# EAGLE board Pi3_Analog_hat (EAGLE 7.6.0)
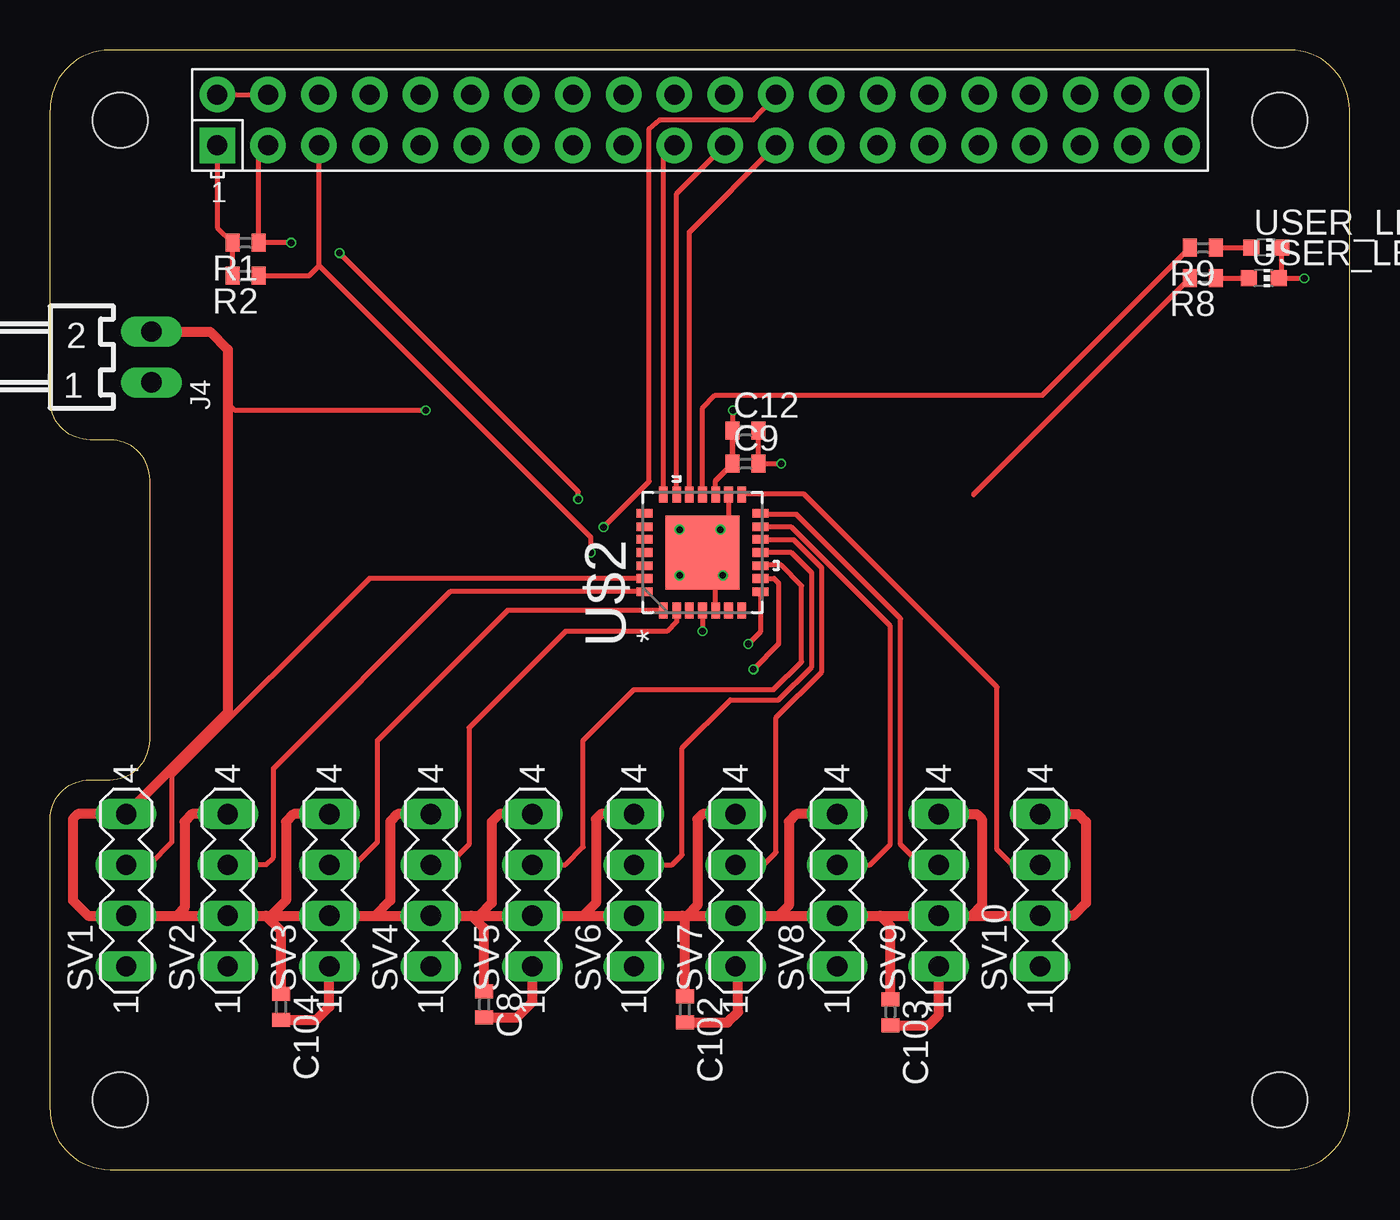
[diagram p0: board, top side]
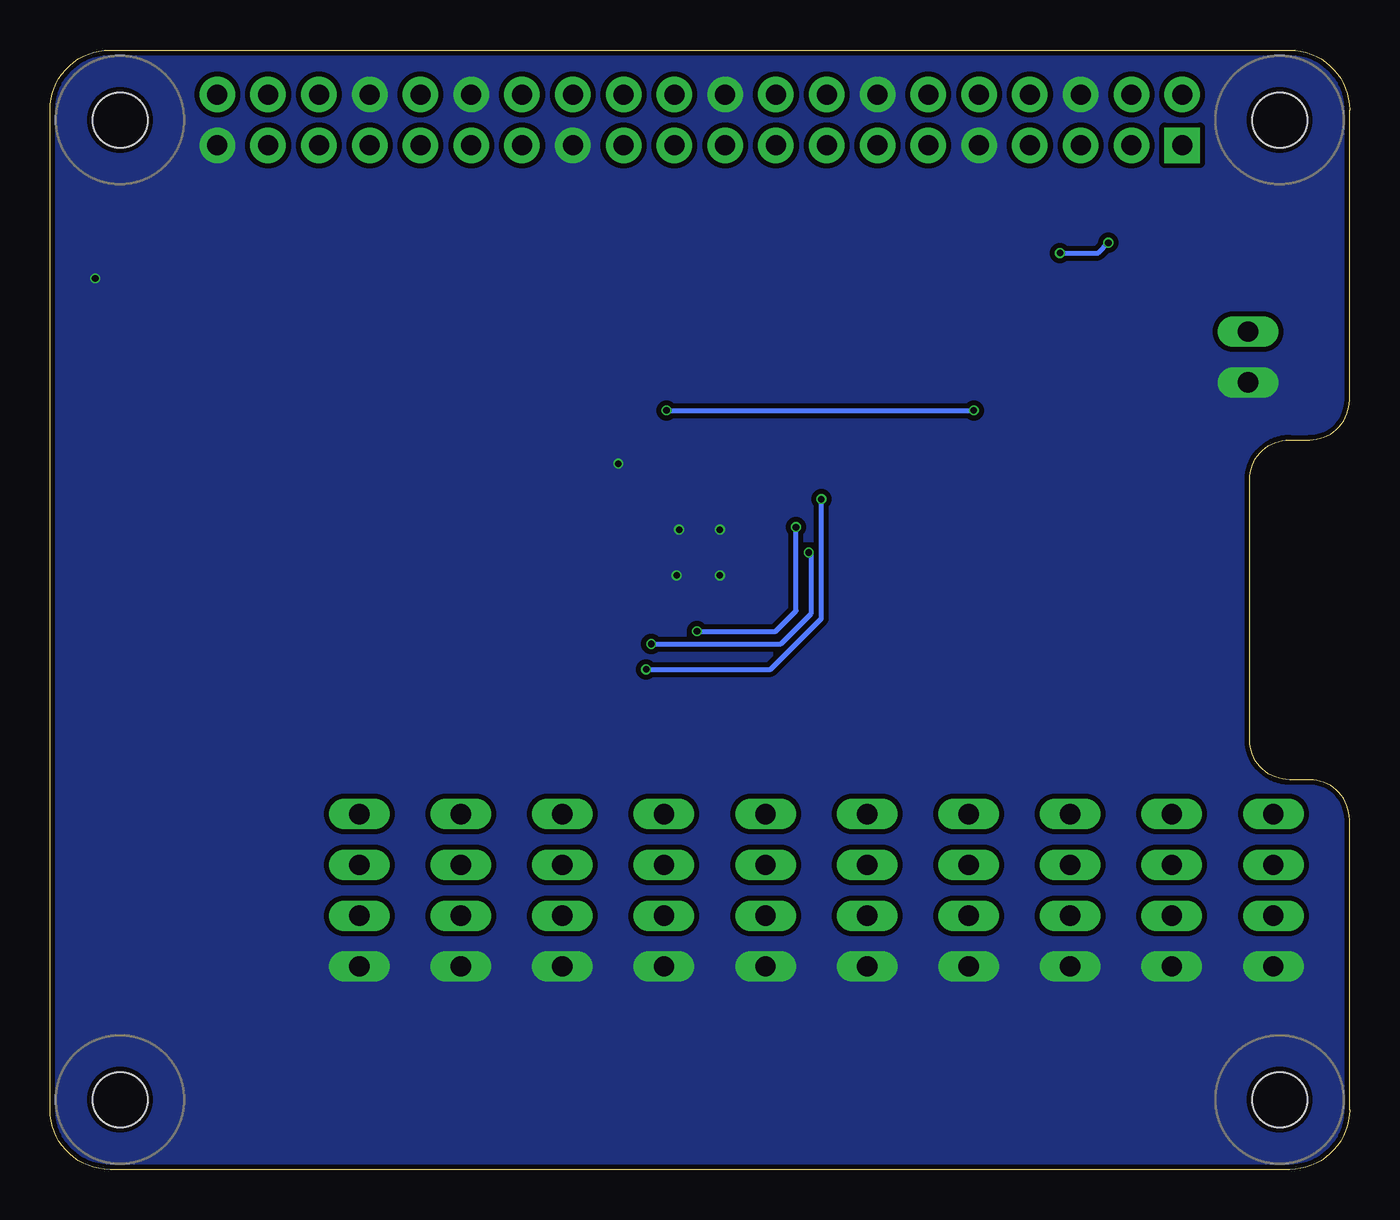
[diagram p1: board, bottom side, seen from below]

Size 65 x 56 mm. Coordinates in mm from the lower left corner, seen from the top.
Copper layers (1*16): Top 0.035mm / dielectric 1.5mm / Bottom 0.035mm
Design rules "EagleRules-2-Layer-Shep": minimum track width 6mil, minimum drill 12mil, track to track 6mil, track to pad 6mil, pad to pad 6mil, via to via 6mil, smd to smd 0mil, copper to edge 10mil, drill to drill 10mil, minimum pad ring 2mil, minimum via ring 2mil, stop-mask expansion 2mil, vias tented up to drill 100mil, thermal gap 10mil

## Footprints (pad centres in the part's own frame; a part is rotated, then mirrored left to right if it is on the bottom)
C0402 = smd 0.7 x 0.9: 1 -0.65,0; 2 0.65,0
7395-02 = drill 1.016 long: 1 1.27,0; 2 -1.27,0
R0402 = smd 0.7 x 0.9: 1 -0.65,0; 2 0.65,0
MA04-1 = drill 1.016 long: 1 -3.81,0; 2 -1.27,0; 3 1.27,0; 4 3.81,0
QFN65P600X600X100-28N = smd 0.813 x 0.432: 1 -2.896,1.956; 2 -2.896,1.295; 3 -2.896,0.66; 4 -2.896,0; 5 -2.896,-0.66; 6 -2.896,-1.295; 7 -2.896,-1.956; 15 2.896,-1.956; 16 2.896,-1.295; 17 2.896,-0.66; 18 2.896,0; 19 2.896,0.66; 20 2.896,1.295; 21 2.896,1.956 | smd 0.432 x 0.813: 8 -1.956,-2.896; 9 -1.295,-2.896; 10 -0.66,-2.896; 11 0,-2.896; 12 0.66,-2.896; 13 1.295,-2.896; 14 1.956,-2.896; 22 1.956,2.896; 23 1.295,2.896; 24 0.66,2.896; 25 0,2.896; 26 -0.66,2.896; 27 -1.295,2.896; 28 -1.956,2.896 | smd 3.708 x 3.708: 29 0,0
CHIP-LED0603 = smd 0.8 x 0.8: A 0,-0.75; C 0,0.75
RASPI_BOARD_B+HAT_DF = drill 1 pad 1.778 square: 1 8.37,51.23 | drill 1 pad 1.778: 2 8.37,53.77; 3 10.91,51.23; 4 10.91,53.77; 5 13.45,51.23; 6 13.45,53.77; 7 15.99,51.23; 8 15.99,53.77; 9 18.53,51.23; 10 18.53,53.77; 11 21.07,51.23; 12 21.07,53.77; 13 23.61,51.23; 14 23.61,53.77; 15 26.15,51.23; 16 26.15,53.77; 17 28.69,51.23; 18 28.69,53.77; 19 31.23,51.23; 20 31.23,53.77; 21 33.77,51.23; 22 33.77,53.77; 23 36.31,51.23; 24 36.31,53.77; 25 38.85,51.23; 26 38.85,53.77; 27 41.39,51.23; 28 41.39,53.77; 29 43.93,51.23; 30 43.93,53.77; 31 46.47,51.23; 32 46.47,53.77; 33 49.01,51.23; 34 49.01,53.77; 35 51.55,51.23; 36 51.55,53.77; 37 54.09,51.23; 38 54.09,53.77; 39 56.63,51.23; 40 56.63,53.77 | hole 2.75: 3.5,3.5; 3.5,52.5; 61.5,3.5; 61.5,52.5

## Placement (x,y rotation side)
C8  1uF  [C0402]  21.72,8.26 270 top
C9  0.1uF  [C0402]  34.8,35.31 0 top
C12  5uF  [C0402]  34.8,36.96 0 top
C102  5uF  [C0402]  31.75,8 270 top
C103  5uF  [C0402]  42.04,7.87 270 top
C104  5uF  [C0402]  11.56,8.13 270 top
J4  22-05-7028-02  [7395-02]  5.08,40.64 270 top
R1  4.7k  [R0402]  9.78,46.35 180 top
R2  4.7k  [R0402]  9.78,44.7 180 top
R8  500  [R0402]  57.66,44.58 180 top
R9  500  [R0402]  57.66,46.1 180 top
SV1  [MA04-1]  3.81,13.97 90 top
SV2  [MA04-1]  8.89,13.97 90 top
SV3  [MA04-1]  13.97,13.97 90 top
SV4  [MA04-1]  19.05,13.97 90 top
SV5  [MA04-1]  24.13,13.97 90 top
SV6  [MA04-1]  29.21,13.97 90 top
SV7  [MA04-1]  34.29,13.97 90 top
SV8  [MA04-1]  39.37,13.97 90 top
SV9  [MA04-1]  44.45,13.97 90 top
SV10  [MA04-1]  49.53,13.97 90 top
U$2  PIC16F73-I/ML  [QFN65P600X600X100-28N]  32.64,30.86 90 top
USER_LED3  [CHIP-LED0603]  60.71,44.58 270 top
USER_LED4  [CHIP-LED0603]  60.83,46.1 270 top
X1  RASPI_BOARD_B+#_HD  [RASPI_BOARD_B+HAT_DF]  0,0 0 top

## Library data of the parts
C8 C9 C12 C102-C104 = rcl
J4 = con-molex; OC_FARNELL: 9731601; OC_NEWARK: unknown
R1 R2 R8 R9 = resistor
SV1-SV10 = con-lstb; OC_FARNELL: unknown; OC_NEWARK: unknown
U$2 = Microchip_By_element14_Batch_1; DESCRIPTION: 8-bit CMOS FLASH Microcontrollers; MPN: PIC16F73-I/ML; OC_FARNELL: 1084327; OC_NEWARK: 97K7368; PACKAGE: QFN-28; SUPPLIER: Microchip
USER_LED3 USER_LED4 = led
X1 = Pi3_Power_hat_Rev1

## Nets
3V3B: X1.17
5V: C8.1 C9.1 C12.1 C102.1 C103.1 C104.1 J4.2 SV1.2 SV1.4 SV2.2 SV2.4 SV3.2 SV3.4 SV4.2 SV4.4 SV5.2 SV5.4 SV6.2 SV6.4 SV7.2 SV7.4 SV8.2 SV8.4 SV9.2 SV9.4 SV10.2 SV10.4 U$2.17
+3V3: R1.2 R2.2 X1.1
CH1: SV10.3 U$2.15
CH2: SV9.3 U$2.14
CH3: SV8.3 U$2.13
CH4: SV7.3 U$2.12
CH5: SV6.3 U$2.11
CH6: SV5.3 U$2.10
CH7: SV4.3 U$2.2
CH8: SV3.3 U$2.1
CH9: SV2.3 U$2.28
CH10: SV1.3 U$2.27
GND: C8.2 C9.2 C12.2 C102.2 C103.2 C104.2 J4.1 SV1.1 SV2.1 SV3.1 SV4.1 SV5.1 SV6.1 SV7.1 SV8.1 SV9.1 SV10.1 U$2.5 U$2.16 U$2.29 USER_LED3.C USER_LED4.C X1.6 X1.9 X1.14 X1.20 X1.25 X1.30 X1.34 X1.39
ICSPCLK: U$2.24
ICSPDAT: U$2.25
MCLR/VPP_A: U$2.26
N$1: X1.2 X1.4
N$2: U$2.3
N$3: U$2.22
N$4: U$2.23
N$9: R8.1 USER_LED3.A
N$10: R9.1 USER_LED4.A
SCL: R2.1 U$2.8 X1.5
SDA: R1.1 U$2.9 X1.3
SPI_CE: U$2.4 X1.24
SPI_MISO: U$2.20 X1.21
SPI_MOSI: U$2.21 X1.19
SPI_SCLK: U$2.19 X1.23
USER5: R8.2
USER6: R9.2 U$2.18

## Tracks (layer width: path | path; a pad name or v marks a point on that pad's centre or on a via)
5V  (via drill 0.33)
  Top 0.254: C12.1 C9.1 33.3,34.46 U$2.17 33.3,34.44 34.16,35.31 v34.16,37.97 | v18.8,37.97 9.27,37.97 8.89,38.35
  Top 0.508: 6.35,12.7 SV1.2 1.91,12.7 1.14,13.46 1.14,17.53 1.4,17.78 SV1.4 8.89,22.86 8.89,38.35 8.89,41.02 8,41.91 J4.2 | 6.35,12.7 SV2.2 10.79,12.7 | 10.79,12.7 11.05,12.7 | 11.05,12.7 SV3.2 16.26,12.7 | 16.26,12.7 SV4.2 21.08,12.7 | 21.08,12.7 21.46,12.7 | 21.46,12.7 SV5.2 26.67,12.7 | 26.67,12.7 SV6.2 31.62,12.7 | 31.62,12.7 31.88,12.7 | 31.88,12.7 SV7.2 36.45,12.7 | 36.45,12.7 SV8.2 41.53,12.7 | 41.53,12.7 SV9.2 46.1,12.7 | 46.1,12.7 SV10.2 51.18,12.7 51.82,13.34 51.82,17.4 51.44,17.78 SV10.4 | SV2.4 7.11,17.78 6.73,17.4 6.73,13.08 6.35,12.7 | SV3.4 12.19,17.78 11.81,17.4 11.81,13.46 11.05,12.7 | SV4.4 17.4,17.78 17.02,17.4 17.02,13.46 16.26,12.7 | SV5.4 22.48,17.78 22.1,17.4 22.1,13.34 21.46,12.7 | SV6.4 27.56,17.78 27.3,17.53 27.3,13.34 26.67,12.7 | SV7.4 32.64,17.78 32.38,17.53 32.38,13.21 31.88,12.7 | SV8.4 37.34,17.78 36.96,17.4 36.96,13.21 36.45,12.7 | SV9.4 46.35,17.78 46.61,17.53 46.61,13.21 46.1,12.7 | C104.1 11.56,11.94 10.79,12.7 | C8.1 21.72,12.06 21.08,12.7 | C102.1 31.75,12.57 31.62,12.7 | C103.1 42.04,12.19 41.53,12.7
  Bottom 0.254: v34.16,37.97 v18.8,37.97
+3V3
  Top 0.254: X1.1 8.37,47.11 R1.2 R2.2
CH1
  Top 0.254: SV10.3 48.13,15.24 47.37,16 47.37,24.13 37.72,33.78 34.62,33.78 U$2.15
CH2
  Top 0.254: SV9.3 43.56,15.24 42.55,16.26 42.55,27.56 37.34,32.77 35.59,32.77 U$2.14
CH3
  Top 0.254: SV8.3 41.02,15.24 42.04,16.26 42.04,27.18 37.08,32.13 35.56,32.13 U$2.13
CH4
  Top 0.254: SV7.3 35.69,15.24 36.32,15.88 36.32,22.61 38.61,24.89 38.61,30.1 37.21,31.5 35.56,31.5 U$2.12
CH5
  Top 0.254: SV6.3 31.11,15.24 31.62,15.75 31.62,21.08 34.04,23.5 36.45,23.5 38.1,25.15 38.1,29.84 37.08,30.86 U$2.11
CH6
  Top 0.254: SV5.3 25.78,15.24 26.67,16.13 26.67,21.46 29.21,24 36.2,24 37.59,25.4 37.59,29.21 36.58,30.23 35.56,30.23 U$2.10
CH7
  Top 0.254: U$2.2 31.34,27.41 30.86,26.92 25.78,26.92 20.95,22.1 20.95,16.26 19.94,15.24 SV4.3
CH8
  Top 0.254: U$2.1 22.89,27.96 16.38,21.46 16.38,16.38 15.24,15.24 SV3.3
CH9
  Top 0.254: U$2.28 20.02,28.91 11.18,20.07 11.18,15.62 10.79,15.24 SV2.3
CH10
  Top 0.254: U$2.27 15.98,29.57 6.1,19.68 6.1,16.38 4.95,15.24 SV1.3
GND  (via drill 0.33)
  Top 0.254: U$2.16 33.93,32.41 v33.53,32 | U$2.5 33.3,29.36 v33.66,29.72 | v62.74,44.58 USER_LED3.C 61.58,44.7 USER_LED4.C | C12.2 C9.2 v36.58,35.31
  Top 0.508: U$2.29 32.64,31.11 v33.53,32 | C8.2 23.35,7.61 24.13,8.38 SV5.1 | C102.2 33.89,7.35 34.42,7.87 34.42,10.03 SV7.1 | C103.2 43.93,7.22 44.45,7.75 SV9.1 | C104.2 13.32,7.48 13.97,8.13 SV3.1
  other vias: 31.5,29.72 31.5,32
  pour Bottom (isolate 0.254, no thermals): 0.13,-0.13 66.93,-0.13 66.93,56.64 0.13,56.64
N$1
  Top 0.254: X1.2 X1.4
N$9
  Top 0.254: R8.1 USER_LED3.A
N$10
  Top 0.254: R9.1 USER_LED4.A
SCL  (via drill 0.33)
  Top 0.254: R2.1 12.95,44.7 13.46,45.21 | 13.46,45.21 13.46,51.22 X1.5 | U$2.8 35.53,26.9 v34.92,26.29 | v27.05,30.86 27.05,31.62 13.46,45.21
  Bottom 0.254: v34.92,26.29 28.45,26.29 26.92,27.81 26.92,30.73 v27.05,30.86
SDA  (via drill 0.33)
  Top 0.254: X1.3 10.43,50.75 R1.1 v12.06,46.35 | U$2.9 36.22,29.57 36.45,29.34 36.45,26.29 v35.18,25.02 | v26.42,33.53 26.42,33.91 v14.48,45.85
  Bottom 0.254: v35.18,25.02 28.96,25.02 26.42,27.56 v26.42,33.53 | v14.48,45.85 12.57,45.85 v12.06,46.35
SPI_CE  (via drill 0.33)
  Top 0.254: U$2.4 v32.64,26.92 | v27.69,32.13 29.97,34.42 29.97,52.07 30.48,52.5 35.18,52.5 36.31,53.71 X1.24
  Bottom 0.254: v32.64,26.92 28.7,26.92 27.69,27.94 v27.69,32.13
SPI_MISO
  Top 0.254: U$2.20 31.34,48.8 X1.21
SPI_MOSI
  Top 0.254: U$2.21 30.68,50.68 X1.19
SPI_SCLK
  Top 0.254: U$2.19 31.98,46.9 X1.23
USER5
  Top 0.254: 46.19,33.76 R8.2
USER6
  Top 0.254: R9.2 49.64,38.73 33.27,38.73 32.64,38.1 U$2.18